# EAGLE board Si5351 STEMMA QT Board (EAGLE 9.6.2)
REV: A
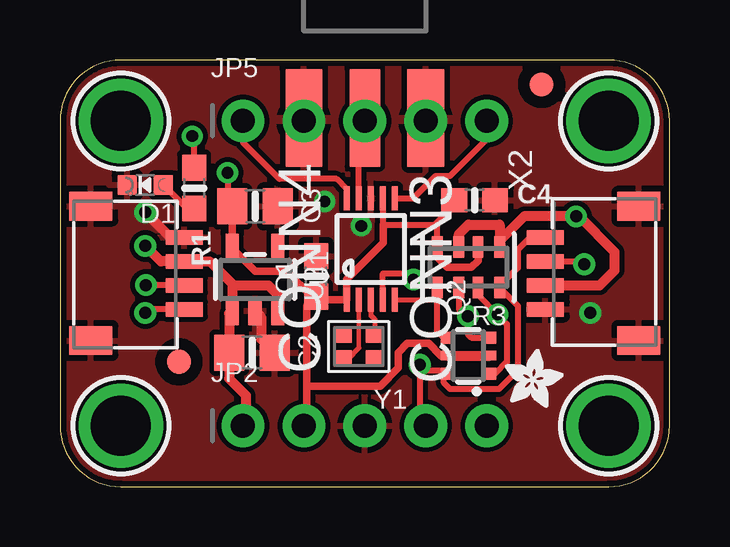
[diagram p0: board, top side]
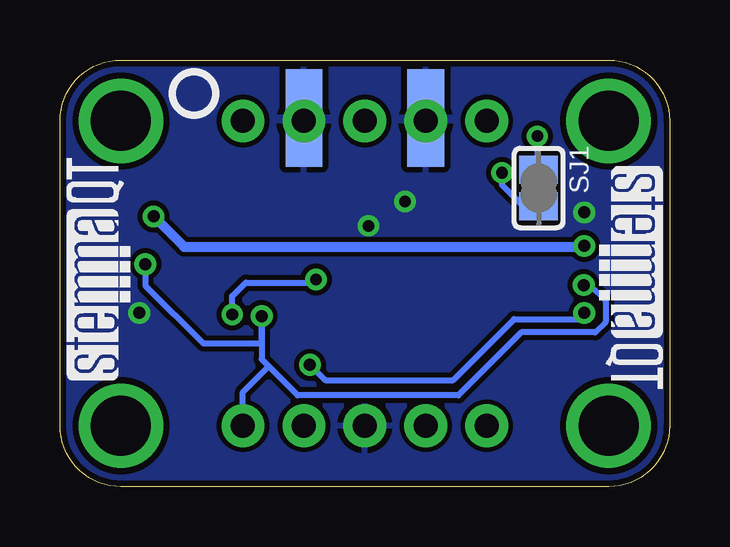
[diagram p1: board, bottom side, seen from below]

Size 25.4 x 17.78 mm. Coordinates in mm from the lower left corner, seen from the top.
Outline: 0,15.24 0,2.54 arc90 2.54,0 22.86,0 arc90 25.4,2.54 25.4,15.24 arc90 22.86,17.78 2.54,17.78 arc90 0,15.24
Copper layers (1*16): Top 0.035mm / dielectric 1.5mm / Bottom 0.035mm
Design rules "adafruit *": minimum track width 8mil, minimum drill 15.5mil, track to track 8mil, track to pad 8mil, pad to pad 8mil, via to via 8mil, smd to smd 8mil, copper to edge 10mil, drill to drill 8mil, minimum pad ring 10mil, minimum via ring 8mil, stop-mask expansion 2mil, vias tented up to drill 20mil, thermal gap 10mil
Net classes: 1 highpower: width 0.305 mm, drill 0.483 mm; 2 lowpower: width 0.254 mm, drill 0.483 mm

## Footprints (pad centres in the part's own frame; a part is rotated, then mirrored left to right if it is on the bottom)
0603-NO = smd 1.075 x 1: 1 -0.85,0; 2 0.85,0
0805-NO = smd 1.24 x 1.5: 1 -0.95,0; 2 0.95,0
JST_SH4 = smd 0.6 x 1.55: 1 -1.5,2.006; 2 -0.5,2.006; 3 0.5,2.006; 4 1.5,2.006 | smd 1.2 x 1.8: MT1 -2.8,-1.894; MT2 2.8,-1.894
CHIPLED_0603_NOOUTLINE = smd 0.8 x 0.8: A 0,-0.75; C 0,0.75
FIDUCIAL_1MM = smd 1 x 1: 1 0,0
1X05_ROUND_70 = drill 1 pad 1.778: 1 -5.08,0; 2 -2.54,0; 3 0,0; 4 2.54,0; 5 5.08,0
SOT363 = smd 0.5 x 0.5: 1 -0.75,-0.9; 3 0.75,-0.9; 4 0.75,0.9; 6 -0.75,0.9 | smd 0.4 x 0.5: 2 0,-0.9; 5 0,0.9
RESPACK_4X0603 = smd 0.45 x 0.9: 1 -1.3,-0.85; 2 -0.4,-0.85; 3 0.4,-0.85; 4 1.3,-0.85; 5 1.3,0.85; 6 0.4,0.85; 7 -0.4,0.85; 8 -1.3,0.85
SOLDERJUMPER_CLOSEDWIRE = smd 1.168 x 1.6: 1 -0.762,0; 2 0.762,0 | smd 0.635 x 0.203: WIRE 0,0
MSOP10 = smd 0.25 x 1: 1 -1,-2.113; 2 -0.5,-2.113; 3 0,-2.113; 4 0.5,-2.113; 5 1,-2.113; 6 1,2.113; 7 0.5,2.113; 8 0,2.113; 9 -0.5,2.113; 10 -1,2.113
SOT23-5 = smd 0.55 x 1.2: 1 -0.95,-1.3; 2 0,-1.3; 3 0.95,-1.3; 4 0.95,1.3; 5 -0.95,1.3
MOUNTINGHOLE_2.5_PLATED = drill 2.5 pad 3.2: P$1 0,0
SMA_EDGELAUNCH = smd 4.064 x 1.524: GND@1 2.032,-2.54; GND@2 2.032,2.54 | smd 4.064 x 1.524 bottom: GND@3 2.032,2.54; GND@4 2.032,-2.54 | smd 4.064 x 1.27: P 2.032,0
CRYSTAL_2X1.6 = smd 0.75 x 0.7: 1 -0.675,-0.5; 2 0.675,-0.5; 3 0.675,0.5; 4 -0.675,0.5

## Placement (x,y rotation side)
C1  0.47uF  [0603-NO]  10.67,8.76 90 top
C2  10uF  [0805-NO]  8,5.59 0 top
C3  10uF  [0805-NO]  8.13,11.68 0 top
C4  0.47uF  [0603-NO]  17.27,11.94 0 top
CONN3  STEMMA_I2C_QT  [JST_SH4]  22.23,8.89 90 top
CONN4  STEMMA_I2C_QT  [JST_SH4]  3.17,8.89 270 top
D1  GREEN  [CHIPLED_0603_NOOUTLINE]  3.56,12.57 90 top
FID3  FIDUCIAL_1MM  [FIDUCIAL_1MM]  4.95,5.21 0 top
FID4  FIDUCIAL_1MM  [FIDUCIAL_1MM]  20.07,16.76 0 top
JP2  [1X05_ROUND_70]  12.7,2.54 0 top
JP5  [1X05_ROUND_70]  12.7,15.24 0 top
PLABEL0  [PLABEL0]  7.49,0.89 0 top
PLABEL1  [PLABEL1]  10.16,4.19 0 top
PLABEL2  [PLABEL2]  12.7,0.89 0 top
PLABEL3  [PLABEL3]  14.86,4.19 0 top
PLABEL4  [PLABEL4]  17.91,0.89 0 top
PLABEL5  [PLABEL5]  0.13,12.45 0 top
PLABEL6  [PLABEL6]  7.49,13.59 0 top
PLABEL7  [PLABEL7]  17.65,13.46 0 top
PLABEL8  [PLABEL8]  10.41,12.57 0 top
PLABEL9  [PLABEL9]  14.99,12.57 0 top
PLABEL10  [PLABEL10]  12.45,8.13 0 bottom
PLABEL11  [PLABEL11]  12.7,1.02 0 bottom
PLABEL12  [PLABEL12]  5.46,16.13 90 bottom
PLABEL13  [PLABEL13]  12.45,4.19 0 bottom
PLABEL14  [PLABEL14]  17.78,13.21 0 bottom
PLABEL15  [PLABEL15]  15.24,12.57 0 bottom
PLABEL16  [PLABEL16]  12.7,13.21 0 bottom
PLABEL17  [PLABEL17]  10.16,12.57 0 bottom
PLABEL18  [PLABEL18]  7.62,13.21 0 bottom
Q2  BSS138  [SOT363]  17.02,5.46 90 top
R1  10K  [0603-NO]  5.59,12.45 270 top
R3  10K pack  [RESPACK_4X0603]  17.02,9.14 180 top
SJ1  [SOLDERJUMPER_CLOSEDWIRE]  5.46,12.45 270 bottom
U1  Si5351A-B-GT  [MSOP10]  12.95,9.91 0 top
U2  AP2127K-3.3  [SOT23-5]  8.13,8.64 0 top
U$1  MOUNTINGHOLE2.5  [MOUNTINGHOLE_2.5_PLATED]  2.54,15.24 0 top
U$9  [ADAFRUIT_2.5MM]  18.54,3.3 0 top
U$17  MOUNTINGHOLE2.5  [MOUNTINGHOLE_2.5_PLATED]  22.86,15.24 0 top
U$19  MOUNTINGHOLE2.5  [MOUNTINGHOLE_2.5_PLATED]  2.54,2.54 0 top
U$21  MOUNTINGHOLE2.5  [MOUNTINGHOLE_2.5_PLATED]  22.86,2.54 0 top
U$25  [PCBFEAT-REV-040]  19.81,16.38 0 bottom
U$30  [STEMMAQT]  22.48,4.45 90 bottom
U$31  [STEMMAQT]  2.92,13.34 270 bottom
X2  SMA  [SMA_EDGELAUNCH]  12.7,17.4 270 top
Y1  25MHz - Seiko Q22FA1280056900  [CRYSTAL_2X1.6]  12.45,5.84 180 top

## Library data of the parts
C1-C4 JP2 JP5 R1 R3 SJ1 U1 U$9 U$25 X2 Y1 = microbuilder
CONN3 CONN4 = adafruit_electromech; LCSC: C2845363
D1 = microbuilder; ROT: 270
FID3 FID4 = microbuilder; BOM: EXCLUDE
PLABEL0 PLABEL1-PLABEL18 = pinguin
Q2 = microbuilder; JLC_ROTATION: 270
U2 = adafruit_power; JLC_ROTATION: 270
U$1 U$17 U$19 U$21 = adafruit_electromech; BOM: EXCLUDE
U$30 U$31 = silks

## Nets
3.3V [lowpower]: C1.1 C3.1 C4.1 JP2.2 Q2.2 Q2.5 R3.2 R3.4 SJ1.2 U1.1 U1.7 U2.5
CLK0: JP5.1 U1.10
CLK1: JP5.3 U1.9 X2.P
CLK2: JP5.5 U1.6
GND [highpower]: C1.2 C2.2 C3.2 C4.2 CONN3.1 CONN3.MT1 CONN3.MT2 CONN4.1 CONN4.MT1 CONN4.MT2 D1.C JP2.3 JP5.2 JP5.4 U1.8 U2.2 X2.GND@1 X2.GND@2 X2.GND@3 X2.GND@4
N$1: D1.A R1.2
N$2 [lowpower]: R1.1 SJ1.1
N$3: U1.3 Y1.1
N$4: U1.2 Y1.3
SCL: CONN3.4 CONN4.4 JP2.4 Q2.6 R3.8
SCL_3V: Q2.1 R3.7 U1.4
SDA: CONN3.3 CONN4.3 JP2.5 Q2.3 R3.6
SDA_3V: Q2.4 R3.5 U1.5
VCC [highpower]: C2.1 CONN3.2 CONN4.2 JP2.1 R3.1 R3.3 U2.1 U2.3

## Tracks (layer width: path | path; a pad name or v marks a point on that pad's centre or on a via)
3.3V  (via drill 0.48)
  Top 0.254: v6.99,13.08 6.99,11.88 C3.1 | U1.7 13.45,10.93 13.46,10.92 15.62,10.92 15.72,11.02 | C4.1 16.42,11.72 15.72,11.02 | R3.4 15.72,11.02
  Top 0.305: R3.2 17.42,9.42 17.14,9.14 16.13,9.14 15.72,9.55 R3.4 | C3.1 U2.5 8.13,8.98 9.43,8.98 10.5,7.91 | 10.5,7.91 C1.1 10.29,7.53 10.29,4.19 | 10.5,7.91 10.62,7.79 U1.1 11.95,8.65 13.46,10.16 13.46,10.92 | Q2.5 15.87,5.46 15.36,5.97 14.48,5.97 14.1,5.59 14.1,4.95 13.34,4.19 10.29,4.19 | JP2.2 10.29,2.67 10.29,4.19
  Top 0.406: Q2.5 Q2.2
  Bottom 0.254: v6.99,13.08 6.99,12.57 6.1,11.68 SJ1.2
CLK0
  Top 0.254: JP5.1 7.62,14.35 9.14,12.83 11.53,12.83 11.95,12.4 U1.10
CLK1
  Top 0.254: U1.9 12.45,13.6 12.7,13.84 12.7,14.99
  Top 0.305: 12.7,14.99 JP5.3 12.83,15.37 12.83,16.26 12.7,16.13 X2.P
CLK2
  Top 0.254: U1.6 14.72,12.02 15.65,12.95 16.26,12.95 17.78,14.48 JP5.5
GND  (via drill 0.48, 0.5)
  Top 0.305: X2.GND@3 JP5.4 | X2.GND@4 10.16,15.75 10.41,16 10.41,15.62 X2.GND@4
  Top 0.406: U2.2 8.38,7.08 8.38,6.16 C2.2 | CONN4.1 4.6,10.39 v3.56,11.43
  other vias: 22.1,7.24 11.03,11.89 12.55,10.87
  pour Top: 0,17.78 25.4,17.78 25.4,0 0,0
  pour Bottom: 0,17.78 25.4,17.78 25.4,0 0,0
N$1
  Top 0.254: D1.A 5.28,11.6 R1.2
N$2  (via drill 0.48)
  Top 0.254: R1.1 5.59,14.53 v5.51,14.61
  Bottom 0.254: v5.51,14.61 5.51,13.21 SJ1.1
N$3
  Top 0.203: U1.3 12.95,7.14 13.12,6.98 Y1.1
N$4
  Top 0.178: U1.2 12.45,5.79
  Top 0.203: 12.45,5.79 12.01,5.34 Y1.3
SCL  (via drill 0.5)
  Top 0.254: CONN3.4 19.58,10.39 19.08,9.88 19.08,9.12 18.28,8.33 R3.8 19.08,7.53 19.08,4.86 18.29,4.06 16.26,4.06 15.99,4.33 15.99,4.58 Q2.6 16,4.83 15.24,4.83 v14.99,5.08 14.99,2.79 JP2.4 | CONN4.4 3.71,7.39 v3.56,7.24
  Bottom 0.254: v14.99,5.08 14.35,4.45 9.02,4.45 6.48,6.99 3.81,6.99 v3.56,7.24
SCL_3V  (via drill 0.48)
  Top 0.254: R3.7 17.42,7.98 v18.22,7.18 18.62,6.78 18.62,5.21 18.13,4.71 Q2.1 | U1.4 13.45,8.88 13.46,8.89 14.48,8.89 v14.73,8.64
  Bottom 0.254: v18.22,7.18 18.22,7.94 17.65,8.51 14.86,8.51 v14.73,8.64
SDA  (via drill 0.5)
  Top 0.254: R3.6 16.62,7.41 16.95,7.07 v17,7.11 17,6.35 17.14,6.21 Q2.3 | CONN4.3 v3.58,8.39 v3.58,8.4 | CONN3.3 21.73,9.39 v21.84,9.27
  Bottom 0.254: v3.58,8.4 3.33,8.4 2.67,7.75 2.67,6.86 3.1,6.43 6.18,6.43 8.8,3.81 15.49,3.81 16.7,5.02 | v21.84,9.27 21.84,8.38 19.43,5.97 17,5.97 v17,7.11 17,5.32 16.7,5.02 | JP2.5 17.78,3.94 16.7,5.02
SDA_3V
  Top 0.203: U1.5 15.51,7.79 15.72,8
  Top 0.254: Q2.4 15.99,6.21 15.72,6.48 15.72,8 R3.5
VCC  (via drill 0.5)
  Top 0.406: R3.3 16.62,10.52 17.02,10.92 18.32,10.92 18.32,10.25 | U2.3 9.08,8 8.7,8.38 7.18,8.38 | 7.18,8.38 7.18,8.45 6.24,9.39 CONN4.2 4.2,9.39 v3.56,10.03 | 7.18,8.38 U2.1 7.05,7.21 C2.1 7.05,4.51 7.75,3.81 7.75,2.67 JP2.1 | CONN3.2 22.49,8.39 23.11,9.02 23.11,9.78 21.63,11.26 v21.5,11.26 19.33,11.26 18.32,10.25 | 18.32,10.25 R3.1
  Bottom 0.406: v3.56,10.03 3.6,9.99 20.23,9.99 v21.5,11.26

## Text on the board
Pinguin_tBackup: #0 | #2 | G | G | on | 3Vo | SCL | VIN | GND | SDA
Pinguin_bBackup: LED | 0 | GND | 1 | GND | 2 | Si5351A / 8KHz-160MHz / Clock Generator | I2C Addr 0x60 | VLogic/Vcc: 3-5VDC